# EAGLE board 9AToF_Final_Schematic_v7 (EAGLE 9.7.0)
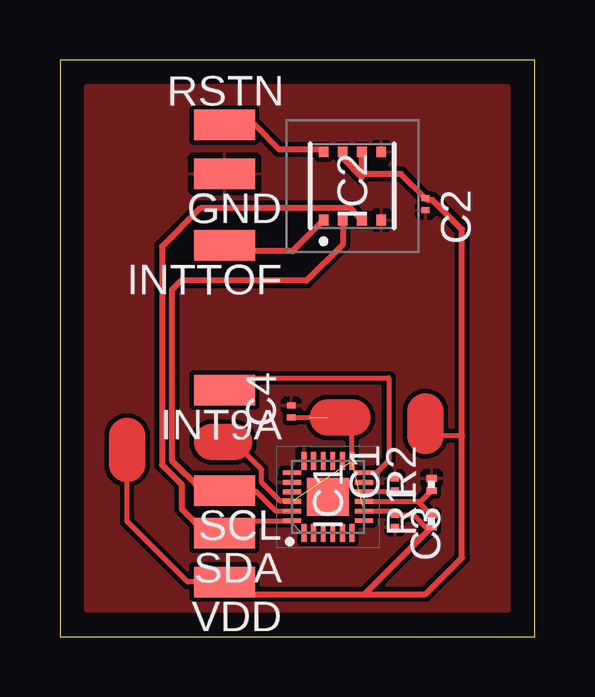
[diagram p0: board, top side]

Size 19.79 x 24.05 mm. Coordinates in mm from the lower left corner, seen from the top.
Outline: 0,0 19.79,0 19.79,24.05 0,24.05 0,0
Copper layers (1*16): Top / Bottom
Stack-up Default Layer Stack: Top User Defined 0.035mm / Dielectric-1 User Defined 1.5mm / Bottom User Defined 0.035mm
Design rules "default *": minimum track width 7mil, minimum drill 0.35mm, track to track 6mil, track to pad 6mil, pad to pad 6mil, via to via 6mil, smd to smd 6mil, copper to edge 40mil, drill to drill 6mil, minimum pad ring 10mil, minimum via ring 8mil, stop-mask expansion 4mil, vias tented up to drill 0mil, thermal gap 10mil
Net classes: 1 VDD: width 0.178 mm, clearance 0.178 mm; 2 GND: width 0.178 mm, clearance 0.178 mm

## Footprints (pad centres in the part's own frame; a part is rotated, then mirrored left to right if it is on the bottom)
C0201 = smd 0.25 x 0.35: 1 -0.25,0; 2 0.25,0
SMD1,27-2,54 = smd 1.27 x 2.54: 1 0,0
QFN40P300X300X105-25N = smd 0.75 x 0.2: 1 -1.5,1; 2 -1.5,0.6; 3 -1.5,0.2; 4 -1.5,-0.2; 5 -1.5,-0.6; 6 -1.5,-1; 13 1.5,-1; 14 1.5,-0.6; 15 1.5,-0.2; 16 1.5,0.2; 17 1.5,0.6; 18 1.5,1 | smd 0.2 x 0.75: 7 -1,-1.5; 8 -0.6,-1.5; 9 -0.2,-1.5; 10 0.2,-1.5; 11 0.6,-1.5; 12 1,-1.5; 19 1,1.5; 20 0.6,1.5; 21 0.2,1.5; 22 -0.2,1.5; 23 -0.6,1.5; 24 -1,1.5 | smd 1.59 x 1.75: 25 0,0
CH101 = smd 0.45 x 0.4: 1 -1.425,1.2; 2 -1.425,0.4; 3 -1.425,-0.4; 4 -1.425,-1.2; 5 1.425,-1.2; 6 1.425,-0.4; 7 1.425,0.4; 8 1.425,1.2
R0201 = smd 0.28 x 0.43: 1 -0.255,0; 2 0.255,0

## Placement (x,y rotation side)
C1  [C0201]  13.97,6.35 90 top
C2  [C0201]  15.24,18.03 270 top
C3  [C0201]  13.97,4.83 270 top
C4  [C0201]  9.65,9.4 90 top
GND  [SMD1,27-2,54]  6.86,19.3 90 top
IC1  ICM-20948  [QFN40P300X300X105-25N]  11.18,5.84 90 top
IC2  CH101  [CH101]  12.19,18.8 90 top
INT9A  [SMD1,27-2,54]  6.86,10.29 90 top
INTTOF  [SMD1,27-2,54]  6.86,16.33 90 top
R1  [R0201]  15.49,4.83 90 top
R2  [R0201]  15.49,6.35 90 top
RSTN  [SMD1,27-2,54]  6.86,21.34 270 top
SCL  [SMD1,27-2,54]  6.86,6.1 90 top
SDA  [SMD1,27-2,54]  6.86,4.32 90 top
VDD  [SMD1,27-2,54]  6.86,2.29 90 top

## Library data of the parts
C1-C4 = rcl; SPICEPREFIX: C
GND INT9A INTTOF RSTN SCL SDA VDD = wirepad
IC1 = ICM-20948; ARROW_PART_NUMBER: ICM-20948; ARROW_PRICE-STOCK: https://www.arrow.com/en/products/icm-20948/invensense?region=nac; DESCRIPTION: IMUs - Inertial Measurement Units World's Lowest Power 9-Axis MEMS MotionTracking Device; HEIGHT: 1.05mm; MANUFACTURER_NAME: TDK; MANUFACTURER_PART_NUMBER: ICM-20948; MOUSER_PART_NUMBER: 410-ICM-20948; MOUSER_PRICE-STOCK: https://www.mouser.co.uk/ProductDetail/TDK-InvenSense/ICM-20948?qs=u4fy%2FsgLU9OtGc31yF%2Friw%3D%3D
IC2 = CH101; DESCRIPTION: Ultrasonic ToF (Time-of-Flight) Sensors, Operating Range=4cm to 1.2m, Current Consumption=13?A (1 sample/sec:10cm max range); HEIGHT: 1.36mm; MANUFACTURER_NAME: TDK; MANUFACTURER_PART_NUMBER: CH101
R1 R2 = rcl; SPICEPREFIX: R

## Nets
+V [VDD]: C2.1 C3.1 C4.1 IC1.8 IC1.13 IC1.22 IC2.6 IC2.7 R1.1 VDD.1
AD0: IC1.9 R1.2 R2.1
GND [GND]: C1.2 C2.2 C3.2 C4.2 GND.1 IC1.11 IC1.18 IC1.20 IC2.4 IC2.5 R2.2
INT9A: IC1.12 INT9A.1
INTTOF: IC2.1 INTTOF.1
REGOUT: C1.1 IC1.10
RSTN [VDD]: IC2.8 RSTN.1
SCL: IC1.23 IC2.2 SCL.1
SDA: IC1.24 IC2.3 SDA.1

## Tracks (layer width: path | path; a pad name or v marks a point on that pad's centre or on a via)
+V  (3 unrouted)
  Top 0.203: IC1.8 13.8,5.24 C3.1 14.74,5.08 15.37,4.44 | VDD.1 5.32,2.29 2.79,4.81 2.79,7.2 | IC1.22 9.66,5.66 9.18,5.66 8.41,6.44 8.41,6.97 7.25,8.13 | IC1.13 12.18,9.13 12.19,9.14 | 16.76,8.38 15.24,8.38 | C4.1 10.41,9.15 10.41,9.14
  Top 0.254: VDD.1 7.11,2.29 7.62,1.78 12.7,1.78 | 12.59,19.3 14.22,19.3 C2.1 15.31,18.21 15.54,18.21 16.76,16.99 16.76,8.38 16.76,3.3 15.24,1.78 12.7,1.78 | 12.59,19.3 12.59,19.16 11.79,19.96 IC2.7 | 12.59,19.3 IC2.6 | 12.7,1.78 15.37,4.44 R1.1
  Top 1.524: 7.25,8.13 6.35,8.13 | 2.79,7.2 2.79,8.38 | 12.19,9.14 11.18,9.14 | 15.24,8.38 15.24,9.4
AD0
  Top 0.203: IC1.9 14.93,5.64 | 14.93,5.64 14.99,5.59 R2.1 | 14.93,5.64 R1.2
GND
  pour Top: 0,23.62 19.81,23.62 19.81,0 0,0
INT9A
  Top 0.203: INT9A.1 7.37,10.79 13.72,10.79 13.72,7.37 13.19,6.84 IC1.12
INTTOF
  Top 0.254: IC2.1 9.7,16.08 7.11,16.08 INTTOF.1
REGOUT
  Top 0.203: IC1.10 13.91,6.04 C1.1
RSTN
  Top 0.254: RSTN.1 8.13,21.34 9.14,20.32 10.89,20.32 IC2.8
SCL
  Top 0.203: SCL.1 8.13,6.1 8.98,5.24 IC1.23
  Top 0.254: IC2.2 11.79,16.36 10.28,14.85 5.05,14.85 4.66,14.46 4.66,7.37 5.93,6.1 SCL.1
SDA
  Top 0.203: SDA.1 7.11,4.32 7.64,4.84 IC1.24
  Top 0.254: SDA.1 6.1,4.32 5.08,5.33 5.08,6.35 4.25,7.18 4.25,16.28 5.85,17.88 12.11,17.88 12.27,17.71 12.27,17.69 IC2.3